# EAGLE board IR Sensor - 6 Channels (EAGLE 9.6.2)
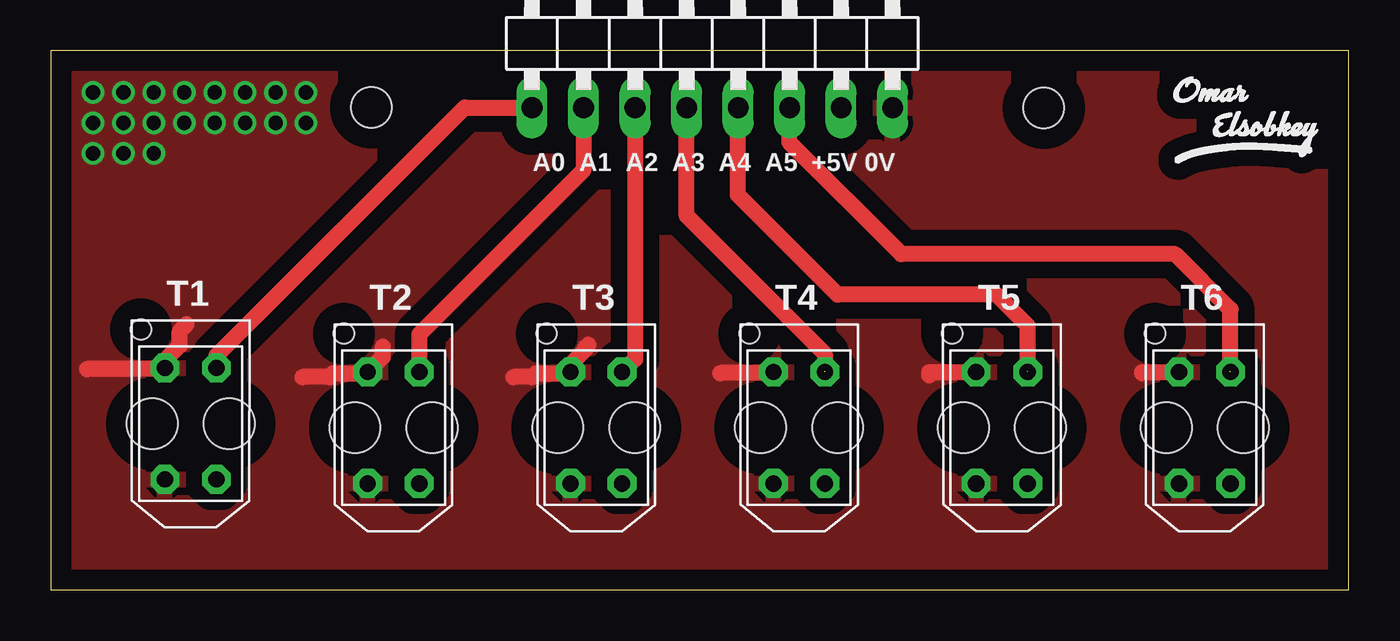
[diagram p0: board, top side]
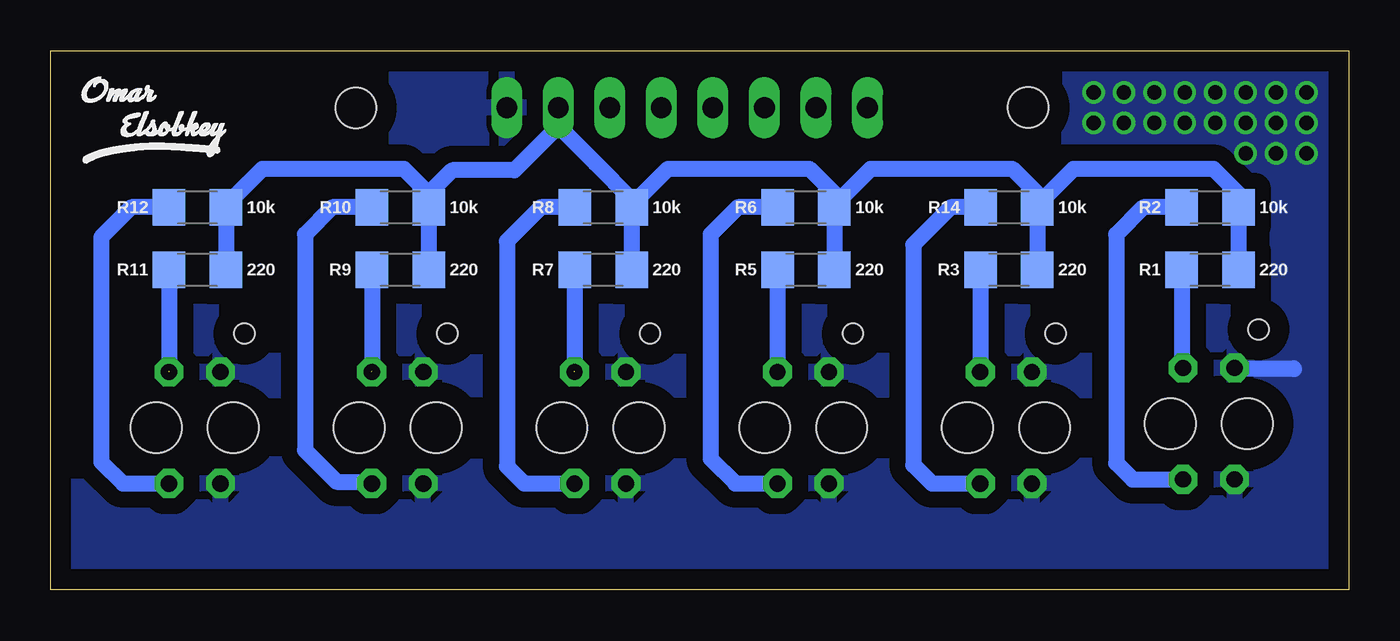
[diagram p1: board, bottom side, seen from below]

Size 64 x 26.6 mm. Coordinates in mm from the lower left corner, seen from the top.
Outline: 0,0 64,0 64,26.6 0,26.6 0,0
Copper layers (1*16): Top 0.035mm / dielectric 1.5mm / Bottom 0.035mm
Design rules "default *": minimum track width 0.8mm, minimum drill 0.7mm, track to track 0.6mm, track to pad 0.6mm, pad to pad 0.6mm, via to via 0.6mm, smd to smd 0.6mm, copper to edge 40mil, drill to drill 6mil, minimum pad ring 10mil, minimum via ring 8mil, stop-mask expansion 4mil, vias tented up to drill 0mil, thermal gap 10mil
Holes 2 mm at 15.8,23.8 48.96,23.77

## Footprints (pad centres in the part's own frame; a part is rotated, then mirrored left to right if it is on the bottom)
1X08/90 = drill 1.016 long: 1 -8.89,-3.81; 2 -6.35,-3.81; 3 -3.81,-3.81; 4 -1.27,-3.81; 5 1.27,-3.81; 6 3.81,-3.81; 7 6.35,-3.81; 8 8.89,-3.81
1206 = smd 1.6 x 1.8: 1 -1.4,0; 2 1.4,0
5000 = drill 0.8 pad 1.422 octagon: P$1 -2.75,1.27; P$2 -2.75,-1.27; P$3 2.75,1.27; P$4 2.75,-1.27 | hole 2.5: 0,1.9; 0,-1.9 | hole 1: -4.65,-2.45

## Placement (x,y rotation side)
POWER  [1X08/90]  32.62,27.6 0 top
R1  220  [1206]  6.84,15.8 0 bottom
R2  10k  [1206]  6.84,18.88 0 bottom
R3  220  [1206]  16.76,15.8 0 bottom
R5  220  [1206]  26.76,15.8 0 bottom
R6  10k  [1206]  26.76,18.88 0 bottom
R7  220  [1206]  36.76,15.8 0 bottom
R8  10k  [1206]  36.76,18.88 0 bottom
R9  220  [1206]  46.76,15.8 0 bottom
R10  10k  [1206]  46.76,18.88 0 bottom
R11  220  [1206]  56.76,15.8 0 bottom
R12  10k  [1206]  56.76,18.88 0 bottom
R14  10k  [1206]  16.76,18.88 0 bottom
T1  TCRT5000  [5000]  6.9,8.2 270 top
T2  TCRT5000  [5000]  16.9,8 270 top
T3  TCRT5000  [5000]  26.9,8 270 top
T4  TCRT5000  [5000]  36.9,8 270 top
T5  TCRT5000  [5000]  46.9,8 270 top
T6  TCRT5000  [5000]  56.9,8 270 top
U$1  [OMAR_ELSOBKEY_X0.5_T]  58.58,22.98 0 top
U$2  [OMAR_ELSOBKEY_X0.5_T]  59.26,22.98 0 bottom
U$3  [OMAR_ELSOBKEY_X0.5_TN]  59.26,22.98 0 bottom
U$4  [OMAR_ELSOBKEY_X0.5_TN]  58.58,22.98 0 top

## Library data of the parts
POWER = pinhead
R1-R3 R5-R12 R14 = SparkFun-Resistors
T1-T6 = IR Sensors
U$1-U$4 = Logos

## Nets
+5V: POWER.7 R1.2 R2.2 R3.2 R5.2 R6.2 R7.2 R8.2 R9.2 R10.2 R11.2 R12.2 R14.2
A0: POWER.1 R1.1 T1.P$1
A1: POWER.2 R3.1 T2.P$1
A2: POWER.3 R5.1 T3.P$1
A3: POWER.4 R7.1 T4.P$1
A4: POWER.5 R9.1 T5.P$1
A5: POWER.6 R11.1 T6.P$1
GND: POWER.8 T1.P$2 T1.P$4 T2.P$2 T2.P$4 T3.P$2 T3.P$4 T4.P$2 T4.P$4 T5.P$2 T5.P$4 T6.P$2 T6.P$4
N$3: R2.1 T1.P$3
N$5: R14.1 T2.P$3
N$7: R6.1 T3.P$3
N$8: R12.1 T6.P$3
N$10: R10.1 T5.P$3
N$13: R8.1 T4.P$3

## Tracks (layer width: path | path; a pad name or v marks a point on that pad's centre or on a via)
+5V
  Bottom 0.8: R1.2 R2.2 5.44,19.54 6.67,20.77 13.56,20.77 15.36,18.98 R14.2 | R14.2 R3.2 | R6.2 R5.2 | R8.2 R7.2 | R9.2 R10.2 45.36,19.54 | R11.2 R12.2 55.36,18.98 53.56,20.77 46.59,20.77 45.36,19.54 | R8.2 35.36,18.98 33.56,20.77 26.59,20.77 25.36,19.54 R6.2 | R6.2 25.36,18.98 23.56,20.77 16.59,20.77 15.36,19.54 R14.2 | POWER.7 38.97,22.87 | 38.97,22.87 37.15,21.05 35.36,19.26 R8.2 | 38.97,22.87 41.14,20.7 44.2,20.7 45.36,19.54
A0
  Top 0.8: POWER.1 20.41,23.79 8.17,11.55 T1.P$1
  Bottom 0.8: R1.1 8.24,11.02 T1.P$1
A1
  Top 0.8: POWER.2 26.27,20.7 18.17,12.6 T2.P$1
  Bottom 0.8: R3.1 T2.P$1
A2
  Top 0.8: POWER.3 28.81,11.39 T3.P$1
  Bottom 0.8: R5.1 T3.P$1
A3  (1 unrouted)
  Top 0.8: T4.P$1 38.17,11.64 31.35,18.46 POWER.4
  Bottom 0.8: R7.1 38.16,10.8
A4  (1 unrouted)
  Top 0.8: POWER.5 33.87,23.77 33.87,19.5 38.8,14.57 46.63,14.57 48.17,13.03 T5.P$1
  Bottom 0.8: R9.1 48.16,10.8
A5  (1 unrouted)
  Top 0.8: POWER.6 36.41,23.77 36.41,22.1 41.94,16.57 55.44,16.57 58.17,13.84 T6.P$1
  Bottom 0.8: R11.1 58.16,10.8
GND  (via drill 0.7)
  Top 0.8: T6.P$2 55.26,10.75 55.24,10.73 53.8,10.73 53.8,10.7 | T5.P$2 45.26,10.75 45.24,10.73 43.3,10.73 43.3,10.6 | T4.P$2 35.63,10.7 33,10.7 | 22.8,10.5 23.73,10.5 23.9,10.67 25.63,10.67 T3.P$2 25.63,11.12 26.37,11.86 26.37,11.96 26.49,12.09 | 12.4,10.5 13.73,10.5 13.9,10.67 15.63,10.67 T2.P$2 16.37,11.49 16.37,12 | 1.8,10.9 5.63,10.9 T1.P$2 5.63,11.32 6.37,12.06 6.37,12.77 6.7,13.1
  Bottom 0.8: T1.P$2 5.26,10.95 5.24,10.93 2.73,10.93 2.7,10.9
  other vias: 2.08,24.54 3.58,24.54 5.08,24.54 6.58,24.54 8.08,24.54 9.58,24.54 11.08,24.54 12.58,24.54 2.08,23.04 2.08,21.54 3.58,23.04 3.58,21.54 5.08,23.04 5.08,21.54 6.58,23.04 8.08,23.04 9.58,23.04 11.08,23.04 12.58,23.04
  pour Bottom (isolate 0.8): -0.9,27.2 64.9,27.2 64.9,-1.8 -0.9,-1.8
  pour Top (isolate 0.8): -1.8,28.1 -1.8,-3 65.8,-3 65.8,28.1
N$3
  Bottom 0.8: R2.1 10.12,18.88 11.47,17.53 11.47,6.27 10.65,5.45 T1.P$3
N$5
  Bottom 0.8: R14.1 19.62,18.88 21.47,17.03 21.47,6.17 20.55,5.25 T2.P$3
N$7
  Bottom 0.8: R6.1 30.12,18.88 31.47,17.53 31.47,6.47 30.25,5.25 T3.P$3
N$8
  Bottom 0.8: R12.1 60.02,18.88 61.5,17.4 61.5,6.3 60.45,5.25 T6.P$3
N$10
  Bottom 0.8: R10.1 50.12,18.88 51.47,17.53 51.47,6.9 49.9,5.33 48.25,5.33 T5.P$3
N$13
  Bottom 0.8: R8.1 39.82,18.88 41.5,17.2 41.5,6.1 40.65,5.25 T4.P$3

## Text on the board
tNames: A0 A1 A2 A3 A4 A5 +5V 0V
200bmp: C:/Users/DELL/Desktop/logo.bmp